# EAGLE board TRV_MRF49_U (EAGLE 6.2)
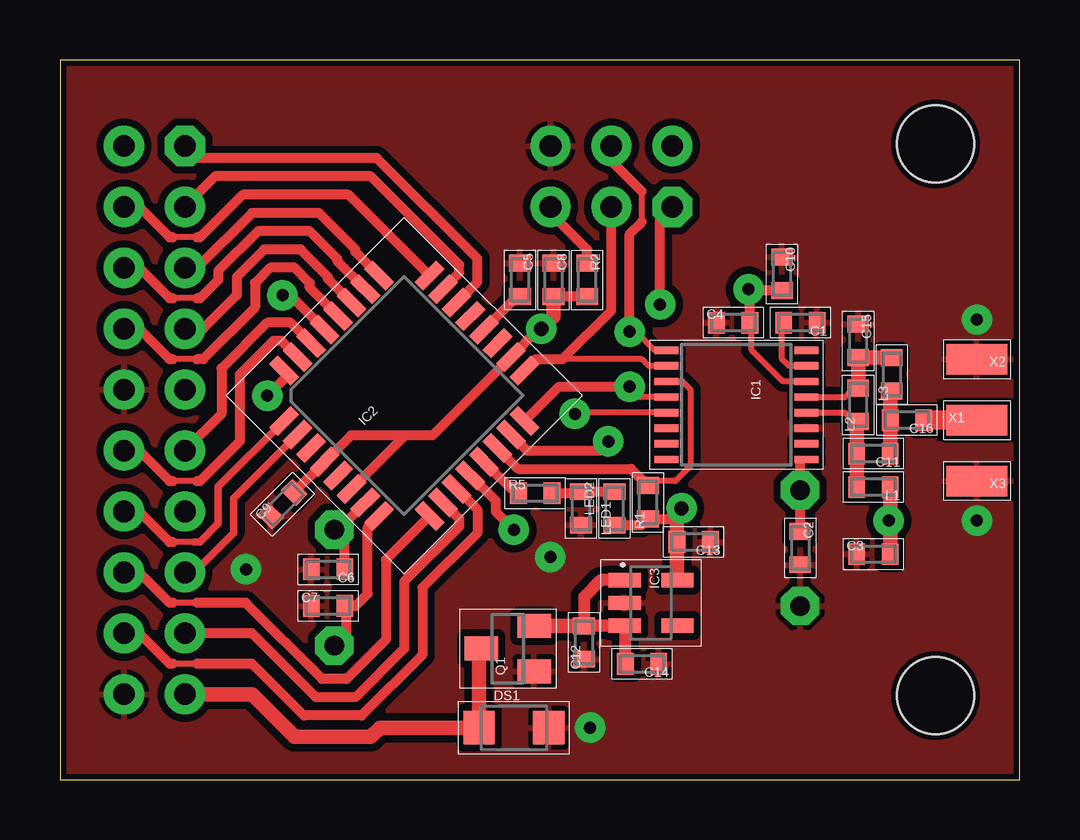
[diagram p0: board, top side]
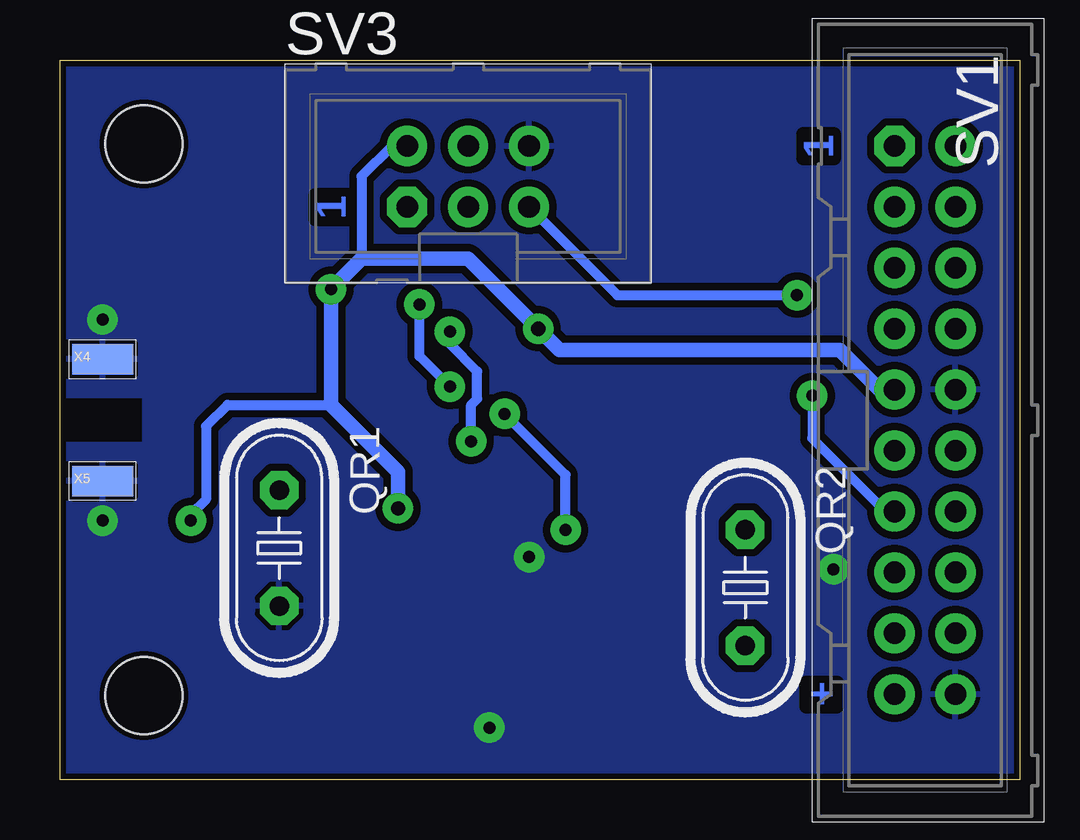
[diagram p1: board, bottom side, seen from below]

Size 40 x 30 mm. Coordinates in mm from the lower left corner, seen from the top.
Outline: 0,0 40,0 40,30 0,30 0,0
Copper layers (1*16): Top 0.035mm / dielectric 1.5mm / Bottom 0.035mm
Design rules: minimum track width 8mil, minimum drill 0.3mm, track to track 12mil, track to pad 12mil, pad to pad 11mil, via to via 12mil, smd to smd 11mil, copper to edge 10mil, drill to drill 8mil, minimum pad ring 5mil, minimum via ring 8mil, stop-mask expansion 4mil, vias tented up to drill 0mil, thermal gap 8mil
Holes 3.2 mm at 36.5,26.5 36.5,3.5

## Footprints (pad centres in the part's own frame; a part is rotated, then mirrored left to right if it is on the bottom)
0603 = smd 0.7 x 0.9: 1 -0.697,0; 2 0.697,0
SMF = smd 1.3 x 1.4: A 1.45,0; C -1.45,0
TSSOP16 = smd 0.305 x 0.991: 1 -2.275,-2.918; 2 -1.625,-2.918; 3 -0.975,-2.918; 4 -0.325,-2.918; 5 0.325,-2.918; 6 0.975,-2.918; 7 1.625,-2.918; 8 2.275,-2.918; 9 2.275,2.918; 10 1.625,2.918; 11 0.975,2.918; 12 0.325,2.918; 13 -0.325,2.918; 14 -0.975,2.918; 15 -1.625,2.918; 16 -2.275,2.918
TQFP32-08 = smd 1.27 x 0.5: 1 -4.293,2.8; 2 -4.293,2; 3 -4.293,1.2; 4 -4.293,0.4; 5 -4.293,-0.4; 6 -4.293,-1.2; 7 -4.293,-2; 8 -4.293,-2.8; 17 4.293,-2.8; 18 4.293,-2; 19 4.293,-1.2; 20 4.293,-0.4; 21 4.293,0.4; 22 4.293,1.2; 23 4.293,2; 24 4.293,2.8 | smd 0.5 x 1.27: 9 -2.8,-4.293; 10 -2,-4.293; 11 -1.2,-4.293; 12 -0.4,-4.293; 13 0.4,-4.293; 14 1.2,-4.293; 15 2,-4.293; 16 2.8,-4.293; 25 2.8,4.293; 26 2,4.293; 27 1.2,4.293; 28 0.4,4.293; 29 -0.4,4.293; 30 -1.2,4.293; 31 -2,4.293; 32 -2.8,4.293
SOT23-5 = smd 0.6 x 1.35: 1 -0.95,-1.101; 2 0,-1.101; 3 0.95,-1.101; 4 0.95,1.101; 5 -0.951,1.101
SOT23 = smd 1 x 1.4: 1 -0.95,-1.1; 2 0.95,-1.1; 3 0,1.1
HC49U-V = drill 0.813 pad 1.6 octagon: 1 -2.413,0; 2 2.413,0
ML20 = drill 0.9 pad 1.676 octagon: 1 -11.43,-1.27 | drill 0.9 pad 1.676: 2 -11.43,1.27; 3 -8.89,-1.27; 4 -8.89,1.27; 5 -6.35,-1.27; 6 -6.35,1.27; 7 -3.81,-1.27; 8 -3.81,1.27; 9 -1.27,-1.27; 10 -1.27,1.27; 11 1.27,-1.27; 12 1.27,1.27; 13 3.81,-1.27; 14 3.81,1.27; 15 6.35,-1.27; 16 6.35,1.27; 17 8.89,-1.27; 18 8.89,1.27; 19 11.43,-1.27; 20 11.43,1.27
ML6 = drill 0.9 pad 1.676 octagon: 1 -2.54,-1.27 | drill 0.9 pad 1.676: 2 -2.54,1.27; 3 0,-1.27; 4 0,1.27; 5 2.54,-1.27; 6 2.54,1.27
S2.54/1.27 = smd 1.27 x 2.54: 1 0,0

## Placement (x,y rotation side)
C1  4n7  [0603]  30.86,19.05 180 top
C2  n.b.  [0603]  30.86,9.65 270 top
C3  47p  [0603]  33.91,9.4 0 top
C4  100n  [0603]  28.07,19.05 0 top
C5  100n  [0603]  19.18,20.83 270 top
C6  22p  [0603]  11.18,8.76 180 top
C7  22p  [0603]  11.18,7.24 0 top
C8  100n  [0603]  20.57,20.83 270 top
C9  100n  [0603]  9.27,11.48 45 top
C10  1u  [0603]  30.1,21.08 270 top
C11  1p2  [0603]  33.91,13.59 180 top
C12  1u  [0603]  21.84,5.71 90 top
C13  1u  [0603]  26.42,9.91 180 top
C14  100n  [0603]  24.27,4.82 180 top
C15  2p7  [0603]  33.27,18.29 270 top
C16  27p  [0603]  35.31,14.99 180 top
DS1  SMF12A  [SMF]  18.92,2.16 0 top
IC1  MRF49XA  [TSSOP16]  28.19,15.62 270 top
IC2  MEGA168PA-AU  [TQFP32-08]  14.35,16 45 top
IC3  LP2992-IM5-3.3  [SOT23-5]  24.64,7.37 270 top
L1  100nH  [0603]  33.91,12.19 180 top
L2  8.2nH  [0603]  33.27,15.62 90 top
L3  22nH  [0603]  34.67,16.89 90 top
LED1  n.b.  [0603]  23.11,11.3 90 top
LED2  LEDR  [0603]  21.72,11.3 270 top
Q1  IRLM9301  [SOT23]  18.67,5.46 90 top
QR1  10.000  [HC49U-V]  30.86,9.65 270 bottom
QR2  16.000  [HC49U-V]  11.43,8 270 bottom
R1  10k  [0603]  24.51,11.56 90 top
R2  10k  [0603]  21.97,20.83 270 top
R5  330R  [0603]  19.81,11.94 0 top
SV1  ISP  [ML20]  3.94,14.99 270 bottom
SV3  ISP  [ML6]  22.99,25.15 0 bottom
X1  ANT  [S2.54/1.27]  38.23,14.99 270 top
X2  GND  [S2.54/1.27]  38.23,17.53 90 top
X3  [S2.54/1.27]  38.23,12.45 90 top
X4  [S2.54/1.27]  38.23,17.53 270 bottom
X5  GND  [S2.54/1.27]  38.23,12.45 270 bottom

## Library data of the parts
C1-C16 L1-L3 R1 R2 R5 = RCL
DS1 = Diode
IC1 = Other
IC2 = atmel
IC3 = DCDC
LED1 LED2 = Optic
Q1 = Transistor
QR1 QR2 = QUARTZ
SV1 SV3 X1-X5 = Conn

## Nets
+3V3: C3.2 C4.2 C8.2 C9.2 C10.2 C13.2 IC1.14 IC2.4 IC2.6 IC2.18 IC3.5 L1.1 LED1.1 R1.1 R2.2 SV1.9 SV3.2
CTS: IC2.10 SV1.17
GND: C1.1 C2.2 C3.1 C4.1 C5.1 C6.2 C7.1 C8.1 C9.1 C10.1 C12.1 C13.1 C14.1 C15.1 DS1.A IC1.11 IC2.3 IC2.5 IC2.21 IC3.2 LED2.2 Q1.1 QR1.2 SV1.10 SV1.20 SV3.6 X2.1 X3.1 X4.1 X5.1
MISO: IC1.4 IC2.16 SV3.1
MOSI: IC1.1 IC2.15 SV3.4
N$1: IC2.22 SV1.1
N$2: C11.2 IC1.12 L1.2 L2.1
N$3: IC2.24 SV1.4
N$4: C2.1 IC1.9 QR1.1
N$5: DS1.C Q1.3 SV1.19
N$6: IC2.23 SV1.3
N$7: C5.2 IC2.20
N$8: IC2.25 SV1.5
N$9: IC2.26 SV1.6
N$10: IC2.27 SV1.7
N$11: IC2.28 SV1.8
N$12: C12.2 C14.2 IC3.1 IC3.3 Q1.2
N$13: IC2.9 SV1.16
N$14: IC2.11 SV1.18
N$15: C15.2 IC1.13 L2.2 L3.2
N$16: IC2.1 SV1.14
N$17: IC2.2 SV1.15
N$18: C6.1 IC2.7 QR2.1
N$19: C7.2 IC2.8 QR2.2
N$20: IC2.32 SV1.13
N$21: LED1.2 LED2.1 R5.2
N$22: IC2.13 R5.1
N$24: C11.1 C16.2 L3.1
N$25: C16.1 X1.1
RIRQ: IC1.5 IC2.12
RSEL: IC1.3 IC2.14 R1.2
RSSI: C1.2 IC1.15
RST: IC2.29 R2.1 SV3.5
RXD: IC2.30 SV1.11
SCK: IC1.2 IC2.17 SV3.3
TXD: IC2.31 SV1.12

## Tracks (layer width: path | path; a pad name or v marks a point on that pad's centre or on a via)
+3V3  (via drill 0.5 pad 1.27, 0.6 pad 1.27)
  Top 0.254: IC1.14 30.14,16.6 28.83,17.91 28.83,18.98 C4.2
  Top 0.406: C9.2 IC2.4 12.13,14.35 14.35,14.35 | 14.35,14.35 15.53,14.35 IC2.18 19.97,18.8 v20.07,18.8 | IC2.6 14.35,14.3 14.35,14.35 | R2.2 C8.2 | C10.2 28.76,20.39 | C4.2 28.76,20.39 | 28.76,20.39 v28.7,20.45 | 25.78,8.38 25.78,8.36 IC3.5 | LED1.1 24.26,10.61 R1.1 25.46,10.86 v25.91,11.3
  Top 0.61: 25.78,8.38 25.72,8.44 C13.2 25.72,11.11 v25.91,11.3 | C3.2 34.61,10.73 v34.54,10.79 34.61,10.86 L1.1 | C8.2 20.57,19.3 v20.07,18.8
  Bottom 0.406: 28.7,15.62 33.02,15.62 33.91,14.73 33.91,11.68 34.54,11.05 v34.54,10.79 | SV3.2 26.16,26.42 27.43,25.15 27.43,21.72
  Bottom 0.61: SV1.9 5.84,16.26 7.49,17.91 19.18,17.91 v20.07,18.8 22.99,21.72 27.43,21.72 v28.7,20.45 28.7,15.62 25.91,12.83 v25.91,11.3
CTS
  Top 0.406: IC2.10 16.64,10.89 16.64,10.54 14.35,8.26 14.35,5.46 12.32,3.43 10.67,3.43 8,6.1 SV1.17
GND  (via drill 0.5 pad 1.27)
  other vias: 7.75,8.76 20.45,9.27 38.23,19.18 38.23,10.79 22.1,2.16
  pour Top: 0,0 40,0 40.01,13.97 36.45,13.97 36.45,16 40,16 40,30 0,30
  pour Bottom: 0,0 40,0 40.01,13.97 36.45,13.97 36.45,16 40,16 40,30 0,30
MISO  (via drill 0.5 pad 1.27)
  Top 0.254: IC1.4 24.19,15.95 v23.75,16.38
  Top 0.406: IC2.16 20.8,16.38 v23.75,16.38 | v25.02,19.81 25.02,23.37 SV3.1
  Bottom 0.406: v23.75,16.38 25.02,17.65 v25.02,19.81
MOSI  (via drill 0.5 pad 1.27)
  Top 0.254: 24.26,23.24 24.26,24.51 | IC1.1 25.27,17.91 24.77,17.91 24,18.67 v23.75,18.67
  Top 0.406: IC2.15 19.46,13.72 22.48,13.72 v22.86,14.1 | v23.75,18.67 23.75,22.73 24.26,23.24 | 24.26,24.51 22.99,25.78 SV3.4
  Bottom 0.406: v22.86,14.1 22.86,15.62 22.61,15.88 22.61,17.02 23.75,18.16 v23.75,18.67
N$1
  Top 0.406: SV1.1 5.71,25.91 13.21,25.91 17.4,21.72 17.4,20.75 IC2.22
N$2
  Top 0.254: IC1.12 32.71,15.3 33.15,14.86 33.21,14.86
  Top 0.61: L1.2 C11.2 33.21,14.86 L2.1
N$3
  Top 0.254: 5.71,22.61 4.7,22.61
  Top 0.406: IC2.24 12.04,24.38 7.62,24.38 5.84,22.61 5.71,22.61 | 4.7,22.61 4.57,22.61 3.3,23.88 SV1.4
N$4
  Top 0.254: 30.86,13.21 30.99,13.34 31.1,13.34 IC1.9
  Top 0.406: C2.1 QR1.1 30.86,13.21
N$5
  Top 0.61: SV1.19 8,3.56 9.78,1.78 12.95,1.78 13.34,2.16 DS1.C 17.47,5.37 Q1.3
N$6
  Top 0.406: IC2.23 16.64,21.12 16.64,21.46 12.95,25.15 6.48,25.15 SV1.3
N$7
  Top 0.406: IC2.20 19.05,20.13 C5.2
N$8
  Top 0.406: SV1.5 5.71,21.34 8,23.62 10.79,23.62 12.32,22.1 12.32,21.99 IC2.25
N$9
  Top 0.254: 5.71,20.07 4.7,20.07
  Top 0.406: 4.7,20.07 4.57,20.07 3.3,21.34 SV1.6 | 5.71,20.07 5.84,20.07 6.6,20.83 6.6,21.21 8.26,22.86 10.41,22.86 11.56,21.72 11.56,21.62 IC2.26
N$10
  Top 0.406: SV1.7 5.97,18.8 7.37,20.19 7.37,20.95 8.51,22.1 10.03,22.1 11.18,20.95 11.18,20.87 IC2.27
N$11
  Top 0.254: 5.71,17.53 4.7,17.53
  Top 0.406: 5.71,17.53 5.97,17.53 8.13,19.68 8.13,20.7 8.76,21.34 9.78,21.34 10.41,20.7 10.41,20.5 IC2.28 | 4.7,17.53 4.57,17.53 3.3,18.8 SV1.8
N$12
  Top 0.508: IC3.1 22.54,8.32 21.84,7.62 C12.2 IC3.3 23.57,6.38 C14.2
  Top 0.61: C12.2 Q1.2
N$13
  Top 0.254: 5.71,7.37 4.7,7.37
  Top 0.406: IC2.9 13.59,9.17 13.59,5.84 11.94,4.19 10.92,4.19 7.75,7.37 5.71,7.37 | 4.7,7.37 4.57,7.37 3.3,8.64 SV1.16
N$14
  Top 0.254: 5.71,4.83 4.7,4.83
  Top 0.406: IC2.11 17.4,11.26 17.4,10.29 15.11,8 15.11,5.21 12.57,2.67 10.16,2.67 8,4.83 5.71,4.83 | 4.7,4.83 4.57,4.83 3.3,6.1 SV1.18
N$15
  Top 0.254: IC1.13 32.71,15.95 33.02,16.26 33.21,16.26 L2.2
  Top 0.61: L2.2 C15.2 L3.2
N$16
  Top 0.254: 5.59,9.91 4.7,9.91
  Top 0.305: IC2.1 6.6,12.21 6.6,10.67 5.84,9.91 5.59,9.91
  Top 0.406: 4.7,9.91 4.57,9.91 3.3,11.18 SV1.14
N$17
  Top 0.305: IC2.2 7.24,11.72 7.24,10.29 5.59,8.64 SV1.15
N$18
  Top 0.406: IC2.7 11.59,10.41 QR2.1 11.87,9.97 C6.1
N$19
  Top 0.406: QR2.2 11.94,6.1 11.94,7.17 C7.2 12.32,7.24 12.83,7.75 12.83,10.52 IC2.8
N$20  (via drill 0.5 pad 1.27)
  Top 0.406: IC2.32 9.36,17.06 9.53,16.89 v8.64,16
  Bottom 0.406: v8.64,16 8.64,14.22 5.59,11.18 SV1.13
N$21
  Top 0.406: R5.2 21.66,11.94 LED2.1 LED1.2
N$22
  Top 0.406: IC2.13 18.98,11.94 R5.1
N$24
  Top 0.61: C11.1 C16.2 34.61,16.13 L3.1
N$25
  Top 0.61: C16.1 36.32,14.99
  Top 0.813: 36.32,14.99 X1.1
RIRQ  (via drill 0.5 pad 1.27)
  Top 0.254: IC1.5 21.52,15.3 v21.46,15.24
  Top 0.406: IC2.12 18.16,11.63 18.16,11.18 v18.92,10.41
  Bottom 0.406: v18.92,10.41 18.92,12.7 v21.46,15.24
RSEL
  Top 0.254: IC1.3 25.95,16.6 26.29,16.26 26.29,13.08 25.65,12.45 24.7,12.45 R1.2
  Top 0.406: IC2.14 19.1,12.95 23.81,12.95 R1.2
RSSI
  Top 0.254: IC1.15 30.38,17.25 30.1,17.53 30.1,18.98 C1.2
RST  (via drill 0.5 pad 1.27)
  Top 0.406: IC2.29 9.59,20.19 v9.27,20.19 | R2.1 21.97,22.1 20.45,23.62 SV3.5
  Bottom 0.406: SV3.5 16.76,20.19 v9.27,20.19
RXD
  Top 0.406: IC2.30 9.61,19.05 8.64,19.05 6.73,17.14 6.73,15.24 SV1.11
SCK
  Top 0.254: IC1.2 24.54,17.25 24.26,17.53 20.95,17.53
  Top 0.406: IC2.17 19.84,17.53 20.95,17.53 22.99,19.56 SV3.3
TXD
  Top 0.254: 5.71,12.45 4.7,12.45
  Top 0.406: IC2.31 9.24,18.29 8.89,18.29 7.49,16.89 7.49,14.1 5.84,12.45 5.71,12.45 | 4.7,12.45 4.57,12.45 3.3,13.72 SV1.12

## Text on the board
Bottom: 1 | 1 | +